# EAGLE board CT_schematic (EAGLE 7.6.0)

Size 100 x 80 mm. Coordinates in mm from the lower left corner, seen from the top.
Outline: 0,0 100,0 100,80 0,80 0,0
Copper layers (1*16): Top 0.035mm / dielectric 1.5mm / Bottom 0.035mm
Design rules "default": minimum track width 10mil, minimum drill 24mil, track to track 8mil, track to pad 8mil, pad to pad 8mil, via to via 8mil, smd to smd 8mil, copper to edge 40mil, drill to drill 8mil, minimum pad ring 10mil, minimum via ring 8mil, stop-mask expansion 4mil, vias tented up to drill 0mil, thermal gap 10mil

## Footprints (pad centres in the part's own frame; a part is rotated, then mirrored left to right if it is on the bottom)
C0603 = smd 0.8 x 0.8: 1 -0.762,0; 2 0.762,0
C0402 = smd 0.5 x 0.5: 1 -0.508,0; 2 0.508,0
C1210 = smd 1.2 x 2.5: 1 -1.524,0; 2 1.524,0
EXV-9H = smd 3.505 x 1.676: 1 -2.857,0; 2 2.857,0
L1210 = smd 1.2 x 2.5: 1 -1.524,0; 2 1.524,0
PJ-037B_PACKAGE = drill 3.7 square: 1 12,0 | drill 3.2 square: 2 6,0
R0603 = smd 0.8 x 0.8: 1 -0.762,0; 2 0.762,0
WLCSP49 = smd 0.25 x 0.25: A1 -1.2,1.2; A2 -0.8,1.2; A3 -0.4,1.2; A4 0,1.2; A5 0.4,1.2; A6 0.8,1.2; A7 1.2,1.2; B1 -1.2,0.8; B2 -0.8,0.8; B3 -0.4,0.8; B4 0,0.8; B5 0.4,0.8; B6 0.8,0.8; B7 1.2,0.8; C1 -1.2,0.4; C2 -0.8,0.4; C3 -0.4,0.4; C4 0,0.4; C5 0.4,0.4; C6 0.8,0.4; C7 1.2,0.4; D1 -1.2,0; D2 -0.8,0; D3 -0.4,0; D4 0,0; D5 0.4,0; D6 0.8,0; D7 1.2,0; E1 -1.2,-0.4; E2 -0.8,-0.4; E3 -0.4,-0.4; E4 0,-0.4; E5 0.4,-0.4; E6 0.8,-0.4; E7 1.2,-0.4; F1 -1.2,-0.8; F2 -0.8,-0.8; F3 -0.4,-0.8; F4 0,-0.8; F5 0.4,-0.8; F6 0.8,-0.8; F7 1.2,-0.8; G1 -1.2,-1.2; G2 -0.8,-1.2; G3 -0.4,-1.2; G4 0,-1.2; G5 0.4,-1.2; G6 0.8,-1.2; G7 1.2,-1.2
SOIC-8 = smd 1.6 x 0.6: 1 -2.7,1.905 | smd 1.55 x 0.6: 2 -2.7,0.635; 3 -2.7,-0.635; 4 -2.7,-1.905; 5 2.7,-1.905; 6 2.7,-0.635; 7 2.7,0.635; 8 2.7,1.905
SSOP-16 = smd 1.981 x 0.356: 1 -2.464,2.223; 2 -2.464,1.587; 3 -2.464,0.953; 4 -2.464,0.318; 5 -2.464,-0.318; 6 -2.464,-0.953; 7 -2.464,-1.587; 8 -2.464,-2.223; 9 2.464,-2.223; 10 2.464,-1.587; 11 2.464,-0.953; 12 2.464,-0.318; 13 2.464,0.318; 14 2.464,0.953; 15 2.464,1.587; 16 2.464,2.223
HTSS-105-01-G-D = drill 1 pad 1.8 square: 1 0,0 | drill 1 pad 1.8: 2 0,2.54; 3 2.54,0; 4 2.54,2.54; 5 5.08,0; 6 5.08,2.54; 7 7.62,0; 8 7.62,2.54; 9 10.16,0; 10 10.16,2.54
TSSOP20-I = smd 0.4 x 1.35: 1 -2.925,-2.875; 2 -2.275,-2.875; 3 -1.625,-2.875; 4 -0.975,-2.875; 5 -0.325,-2.875; 6 0.325,-2.875; 7 0.975,-2.875; 8 1.625,-2.875; 9 2.275,-2.875; 10 2.925,-2.875; 11 2.925,2.875; 12 2.275,2.875; 13 1.625,2.875; 14 0.975,2.875; 15 0.325,2.875; 16 -0.325,2.875; 17 -0.975,2.875; 18 -1.625,2.875; 19 -2.275,2.875; 20 -2.925,2.875
ABLS-25.000MHZ-B2F-T = smd 5.6 x 2.8: 1 -3.81,0; 2 5.69,0
ASEK = smd 1.4 x 1: 1 -1.1,-0.8; 2 1.1,-0.8; 3 1.1,0.8; 4 -1.1,0.8
SOIC-8_EP = smd 1.6 x 0.533: 1 -2.921,1.905; 2 -2.921,0.635; 3 -2.921,-0.635; 4 -2.921,-1.905; 5 2.921,-1.905; 6 2.921,-0.635; 7 2.921,0.635; 8 2.921,1.905 | smd 2.54 x 3.302: EPAD 0,0 | drill 0.406 pad 0.406: P$1 -0.508,0.635; P$2 0.381,0.635; P$3 -0.508,-0.635; P$4 0.381,-0.635
SON-6 = smd 0.55 x 0.3: 1 -0.355,0.5 | smd 0.52 x 0.3: 2 -0.37,0; 3 -0.37,-0.5; 4 0.37,-0.5; 5 0.37,0; 6 0.37,0.5
SW_4-1437565-2 = smd 1.4 x 2.1: 1 -2.23,4.55; 2 -2.23,-4.55; 3 2.23,4.55; 4 2.23,-4.55
LGM67K-G1J2-24-Z = smd 0.8 x 1.4: A -2,0; C 0,0
NC7SZ125M5X = smd 1.3 x 0.7: 1 -1.3,0.95; 2 -1.3,0; 3 -1.3,-0.95; 4 1.3,-0.95; 5 1.3,0.95
DUMMY_PACKAGE_132 = drill 0.3: 1 0,-1; 2 1.5,-1; 3 3,-1

## Placement (x,y rotation side)
C1  1e-06  [C0603]  -46.99,59.69 0 top  (outside the outline)
C2  1e-07  [C0603]  -50.8,59.69 0 top  (outside the outline)
C3  1e-07  [C0603]  -54.61,59.69 0 top  (outside the outline)
C4  1e-07  [C0603]  -58.42,59.69 0 top  (outside the outline)
C5  1e-07  [C0603]  -62.23,59.69 0 top  (outside the outline)
C6  1e-07  [C0603]  -66.04,59.69 0 top  (outside the outline)
C7  4.7e-06  [C0603]  -39.37,59.69 0 top  (outside the outline)
C8  1e-08  [C0603]  -15.24,64.77 0 top  (outside the outline)
C9  1e-06  [C0603]  -19.05,64.77 0 top  (outside the outline)
C10  1e-07  [C0603]  -22.86,64.77 0 top  (outside the outline)
C11  1e-11  [C0402]  -60.96,64.77 0 top  (outside the outline)
C12  1e-11  [C0402]  -64.77,64.77 0 top  (outside the outline)
C13  1e-08  [C0402]  -68.58,64.77 0 top  (outside the outline)
C14  1e-06  [C0603]  -26.67,64.77 0 top  (outside the outline)
C15  1e-06  [C0603]  -30.48,64.77 0 top  (outside the outline)
C16  2.2e-07  [C0603]  -43.18,59.69 0 top  (outside the outline)
C17  1e-06  [C0603]  -34.29,64.77 0 top  (outside the outline)
C18  1e-06  [C0603]  -38.1,64.77 0 top  (outside the outline)
C19  1e-07  [C0402]  -15.24,69.85 0 top  (outside the outline)
C20  1e-07  [C0402]  -19.05,69.85 0 top  (outside the outline)
C21  1e-07  [C0402]  -22.86,69.85 0 top  (outside the outline)
C22  1e-07  [C0402]  -26.67,69.85 0 top  (outside the outline)
C23  1e-07  [C0402]  -30.48,69.85 0 top  (outside the outline)
C24  1e-07  [C0402]  -34.29,69.85 0 top  (outside the outline)
C25  1e-08  [C0402]  -38.1,69.85 0 top  (outside the outline)
C26  1e-05  [C1210]  -53.34,46.99 0 top  (outside the outline)
C27  1e-05  [C1210]  -59.69,46.99 0 top  (outside the outline)
C28  1e-05  [C1210]  -66.04,46.99 0 top  (outside the outline)
C29  1e-05  [C1210]  -16.51,53.34 0 top  (outside the outline)
C30  1e-07  [C0402]  -41.91,69.85 0 top  (outside the outline)
C31  0.0001  [EXV-9H]  -17.78,39.37 0 top  (outside the outline)
C32  0.0001  [EXV-9H]  -29.21,39.37 0 top  (outside the outline)
C33  1e-08  [C0402]  -45.72,69.85 0 top  (outside the outline)
I1  1e-05  [L1210]  -22.86,53.34 0 top  (outside the outline)
J1  PJ-037B  [PJ-037B_PACKAGE]  -27.94,7.62 0 top  (outside the outline)
R1  10000.0  [R0603]  -58.42,53.34 0 top  (outside the outline)
R2  1000.0  [R0603]  -41.91,64.77 0 top  (outside the outline)
R3  1600.5  [R0603]  -45.72,64.77 0 top  (outside the outline)
R4  4700.0  [R0603]  -49.53,64.77 0 top  (outside the outline)
R5  10000.0  [R0603]  -63.5,53.34 0 top  (outside the outline)
R6  10000.0  [R0603]  -15.24,59.69 0 top  (outside the outline)
R7  10000.0  [R0603]  -20.32,59.69 0 top  (outside the outline)
R8  10000.0  [R0603]  -25.4,59.69 0 top  (outside the outline)
R9  100000.0  [R0603]  -43.18,53.34 0 top  (outside the outline)
R10  4031.5447154472  [R0603]  -38.1,53.34 0 top  (outside the outline)
R11  2200.0  [R0603]  -53.34,64.77 0 top  (outside the outline)
R12  10000.0  [R0603]  -30.48,59.69 0 top  (outside the outline)
R13  10000.0  [R0603]  -35.56,59.69 0 top  (outside the outline)
R14  9100.0  [R0603]  -57.15,64.77 0 top  (outside the outline)
R15  680000.0  [R0603]  -48.26,53.34 0 top  (outside the outline)
R16  120000.0  [R0603]  -53.34,53.34 0 top  (outside the outline)
U1  STM32L443CCY6  [WLCSP49]  -25.4,46.99 0 top  (outside the outline)
U2  AT25080B-SSHL-T  [SOIC-8]  -43.18,30.48 0 top  (outside the outline)
U3  LTC2804CGN-1#PBF  [SSOP-16]  -29.21,20.32 0 top  (outside the outline)
U4  HTSS-105-01-G-D  [HTSS-105-01-G-D]  -48.26,19.05 0 top  (outside the outline)
U5  SP3203ECY-L/TR  [TSSOP20-I]  -59.69,6.35 0 top  (outside the outline)
U6  HTSS-105-01-G-D  [HTSS-105-01-G-D]  -27.94,29.21 0 top  (outside the outline)
U7  ABLS-25.000MHZ-B2F-T  [ABLS-25.000MHZ-B2F-T]  -48.26,39.37 0 top  (outside the outline)
U8  ASEK-32.768KHz-ECST  [ASEK]  -64.77,30.48 0 top  (outside the outline)
U9  MIC5234YME  [SOIC-8_EP]  -33.02,45.72 0 top  (outside the outline)
U10  TPS3895ADRYR  [SON-6]  -54.61,68.58 0 top  (outside the outline)
U11  4-1437565-2  [SW_4-1437565-2]  -44.45,6.35 0 top  (outside the outline)
U12  Q65110A2395  [LGM67K-G1J2-24-Z]  -41.91,46.99 0 top  (outside the outline)
U13  nc7sz125m5x  [NC7SZ125M5X]  -27.94,53.34 0 top  (outside the outline)
U14  Dummy  [DUMMY_PACKAGE_132]  -52.07,69.85 0 top  (outside the outline)

## Library data of the parts
C1-C33 I1 J1 R1-R16 U1-U14 = circuit_tree

## Nets
CLK_CRYSTAL_U1_D6: C11.1 U1.D6 U7.1
CLK_CRYSTAL_U1_D7: C12.1 U1.D7 U7.2
CLK_U1_C7: U1.C7 U8.3
GND: C1.2 C2.2 C3.2 C4.2 C5.2 C6.2 C7.2 C8.2 C9.2 C10.2 C11.2 C12.2 C13.2 C14.2 C15.2 C17.2 C18.2 C19.2 C20.2 C23.2 C24.2 C25.2 C26.2 C27.2 C28.2 C29.2 C30.2 C31.2 C32.2 C33.2 J1.2 R2.2 R5.2 R11.2 R14.2 R16.2 U1.A6 U1.B1 U1.E7 U1.G2 U2.4 U3.8 U4.9 U5.18 U6.9 U8.2 U9.7 U9.EPAD U10.2 U12.C U13.1 U13.3 U14.1
NET_U1_A5: R5.1 U1.A5
NET_U1_D5: R4.1 U1.D5 U13.4
NET_U1_G6: R3.1 U1.G6 U12.A
NET_U1_G7: R1.1 U1.G7 U11.3 U11.4
NET_U2_3: R6.1 U2.3
NET_U2_7: R8.1 U2.7
NET_U3_6: C14.1 U3.6
NET_U3_7: C16.1 I1.2 U3.7
NET_U3_9: C15.1 U3.9
NET_U3_10: C16.2 U3.10
NET_U3_11: R9.1 U3.11
NET_U4_3: U3.1 U4.3
NET_U4_4: U3.2 U4.4
NET_U4_5: U3.3 U4.5
NET_U4_6: U3.4 U4.6
NET_U5_1: C21.1 U5.1
NET_U5_2: C23.1 U5.2
NET_U5_3: C21.2 U5.3
NET_U5_4: C22.1 U5.4
NET_U5_5: C22.2 U5.5
NET_U5_6: C24.1 U5.6
NET_U5_20: U5.20
NET_U6_3: U5.14 U6.3
NET_U6_4: U5.13 U6.4
NET_U6_5: U5.17 U6.5
NET_U6_6: U5.16 U6.6
NET_U9_4: R10.2 R11.1 U9.4
NET_U10_1: R13.1 R14.1 U10.1
NET_U10_3: R15.2 R16.1 U10.3
NET_U10_4: R12.1 U10.4 U13.2
NET_U11_1: R2.1 U11.1 U11.2
PROC_ADC1_IN11: U1.F4 U14.3
PROC_ADC1_IN16: U1.G4 U14.2
PROC_LPUART1_CTS: U1.E2 U5.8
PROC_LPUART1_RTS: U1.F1 U5.10
PROC_LPUART1_RX: U1.E3 U5.11
PROC_LPUART1_TX: U1.E5 U5.7
PROC_SPI1_MISO: U1.C1 U2.2
PROC_SPI1_MOSI: U1.B4 U2.5
PROC_SPI1_NSS: R7.1 U1.B3 U2.1
PROC_SPI1_SCK: U1.F5 U2.6
PROC_USART1_CTS: U1.A4 U3.13
PROC_USART1_RTS: U1.A3 U3.15
PROC_USART1_RX: U1.C2 U3.16
PROC_USART1_TX: U1.C4 U3.14
VCC_S1_14V2: C26.1 C27.1 C31.1 C32.1 J1.1 U9.5 U9.8
VCC_TIER1_3V3: C1.1 C2.1 C3.1 C4.1 C5.1 C6.1 C7.1 C8.1 C9.1 C10.1 C13.1 C17.1 C18.1 C19.1 C20.1 C25.1 C28.1 C29.1 C30.1 C33.1 I1.1 R1.2 R3.2 R4.2 R6.2 R7.2 R8.2 R9.2 R10.1 R12.2 R13.2 R15.1 U1.A1 U1.A7 U1.B6 U1.F7 U1.G1 U2.8 U3.5 U3.12 U5.12 U5.19 U8.4 U9.1 U10.6 U13.5

## Tracks (layer width: path | path; a pad name or v marks a point on that pad's centre or on a via)
CLK_CRYSTAL_U1_D6  (2 unrouted)
CLK_CRYSTAL_U1_D7  (2 unrouted)
CLK_U1_C7  (1 unrouted)
GND  (52 unrouted)
NET_U1_A5  (1 unrouted)
NET_U1_D5  (2 unrouted)
NET_U1_G6  (2 unrouted)
NET_U1_G7  (3 unrouted)
NET_U2_3  (1 unrouted)
NET_U2_7  (1 unrouted)
NET_U3_6  (1 unrouted)
NET_U3_7  (2 unrouted)
NET_U3_9  (1 unrouted)
NET_U3_10  (1 unrouted)
NET_U3_11  (1 unrouted)
NET_U4_3  (1 unrouted)
NET_U4_4  (1 unrouted)
NET_U4_5  (1 unrouted)
NET_U4_6  (1 unrouted)
NET_U5_1  (1 unrouted)
NET_U5_2  (1 unrouted)
NET_U5_3  (1 unrouted)
NET_U5_4  (1 unrouted)
NET_U5_5  (1 unrouted)
NET_U5_6  (1 unrouted)
NET_U6_3  (1 unrouted)
NET_U6_4  (1 unrouted)
NET_U6_5  (1 unrouted)
NET_U6_6  (1 unrouted)
NET_U9_4  (2 unrouted)
NET_U10_1  (2 unrouted)
NET_U10_3  (2 unrouted)
NET_U10_4  (2 unrouted)
NET_U11_1  (2 unrouted)
PROC_ADC1_IN11  (1 unrouted)
PROC_ADC1_IN16  (1 unrouted)
PROC_LPUART1_CTS  (1 unrouted)
PROC_LPUART1_RTS  (1 unrouted)
PROC_LPUART1_RX  (1 unrouted)
PROC_LPUART1_TX  (1 unrouted)
PROC_SPI1_MISO  (1 unrouted)
PROC_SPI1_MOSI  (1 unrouted)
PROC_SPI1_NSS  (2 unrouted)
PROC_SPI1_SCK  (1 unrouted)
PROC_USART1_CTS  (1 unrouted)
PROC_USART1_RTS  (1 unrouted)
PROC_USART1_RX  (1 unrouted)
PROC_USART1_TX  (1 unrouted)
VCC_S1_14V2  (6 unrouted)
VCC_TIER1_3V3  (45 unrouted)